# EAGLE board board_master (EAGLE 9.6.2)
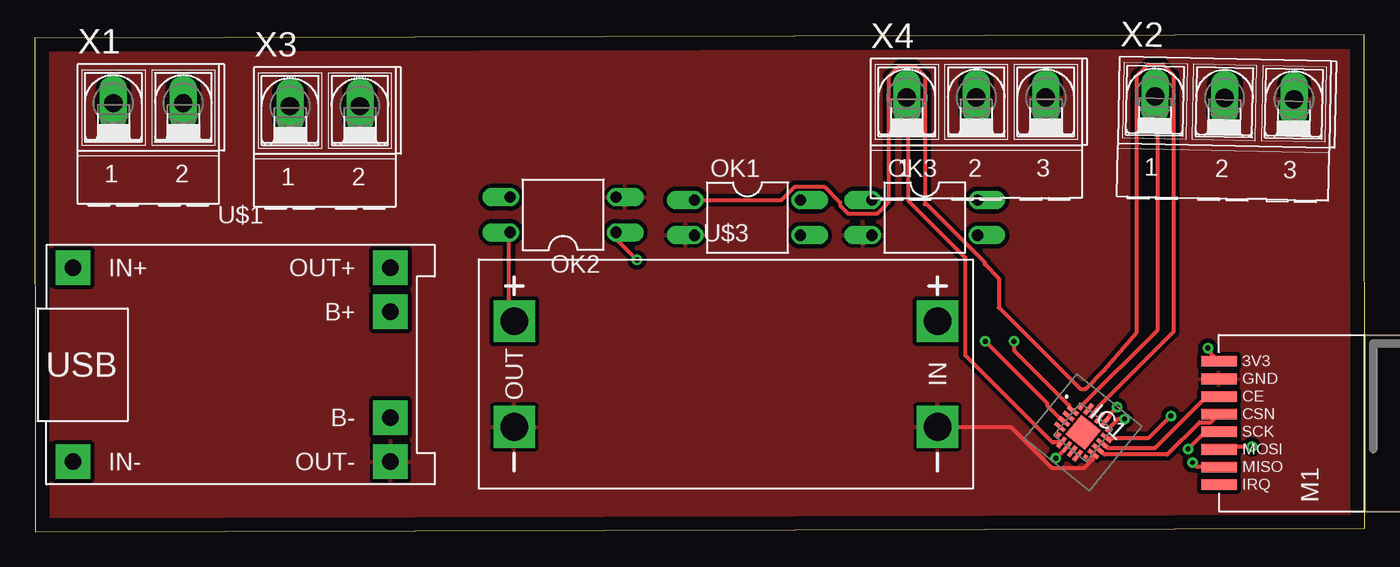
[diagram p0: board, top side]
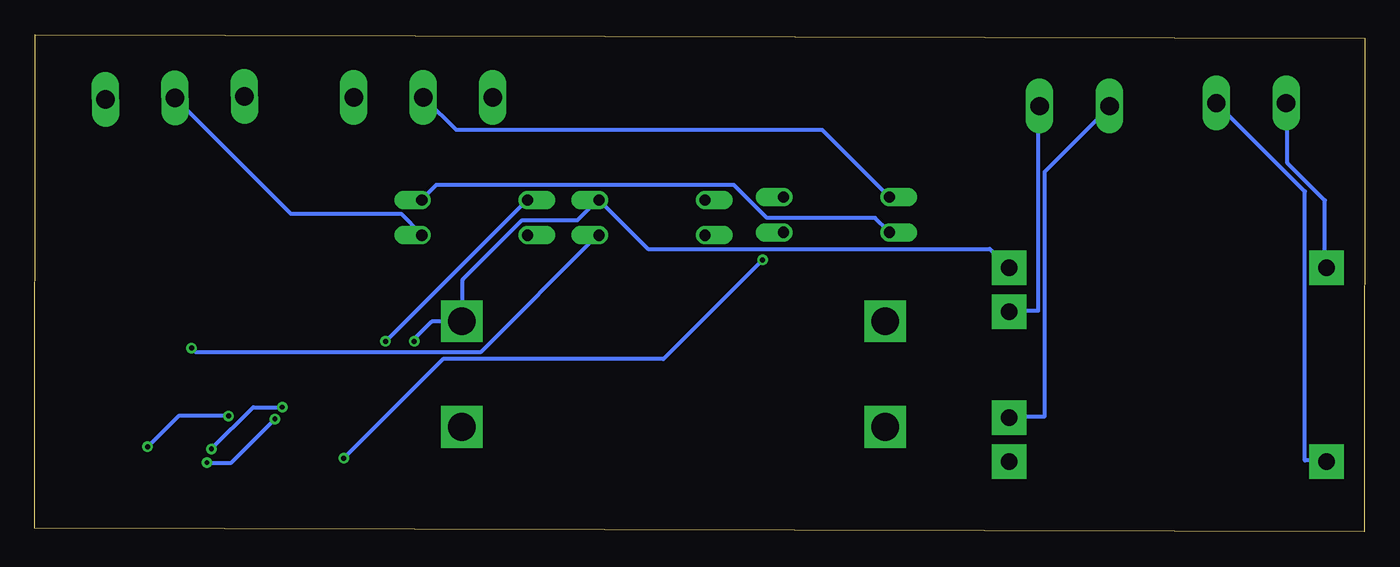
[diagram p1: board, bottom side, seen from below]

Size 95.77 x 35.82 mm. Coordinates in mm from the lower left corner, seen from the top.
Outline: 0.03,0 95.77,0.27 95.73,35.82 0,35.55 0.03,0
Copper layers (1*16): Top 0.035mm / dielectric 1.5mm / Bottom 0.035mm
Design rules "default": minimum track width 6mil, minimum drill 0.35mm, track to track 6mil, track to pad 6mil, pad to pad 6mil, via to via 6mil, smd to smd 6mil, copper to edge 40mil, drill to drill 6mil, minimum pad ring 10mil, minimum via ring 8mil, stop-mask expansion 4mil, vias tented up to drill 0mil, thermal gap 10mil
Net classes: 0 default: width 0.305 mm

## Footprints (pad centres in the part's own frame; a part is rotated, then mirrored left to right if it is on the bottom)
EFM8BB10F2GAQFN20R = smd 0.3 x 0.3: 1 -1.25,1.25; 6 -1.25,-1.25; 11 1.25,-1.25; 16 1.25,1.25 | smd 0.9 x 0.3: 2 -1.55,0.75; 3 -1.55,0.25; 4 -1.55,-0.25; 5 -1.55,-0.75; 12 1.55,-0.75; 13 1.55,-0.25; 14 1.55,0.25; 15 1.55,0.75 | smd 0.3 x 0.9: 7 -0.75,-1.55; 8 -0.25,-1.55; 9 0.25,-1.55; 10 0.75,-1.55; 17 0.75,1.55; 18 0.25,1.55; 19 -0.25,1.55; 20 -0.75,1.55 | smd 1.8 x 1.8: 21 0,0
WIRELESS-NRF24L01-SMD = smd 2.54 x 0.762: 1 1.27,0; 2 1.27,1.27; 3 1.27,2.54; 4 1.27,3.81; 5 1.27,5.08; 6 1.27,6.35; 7 1.27,7.62; 8 1.27,8.89
DIL04 = drill 0.813 offset: 1 -1.27,-3.81; 2 1.27,-3.81; 3 1.27,3.81; 4 -1.27,3.81
BATTERY-CHARGER-LI-PROT = drill 1.2 pad 2.5 square: B+ 10.795,3.81; B- 10.795,-3.81; IN+ -12.065,6.985; IN- -12.065,-6.985; OUT+ 10.795,6.985; OUT- 10.795,-6.985
DC-DC-STEP-UP-MT3608 = drill 2 pad 2.8 square: IN+ 15.24,3.81; IN- 15.24,-3.81; OUT+ -15.24,3.81; OUT- -15.24,-3.81
AK500/2-H = drill 1.321 long: 1 -2.515,0; 2 2.515,0
AK500/3-H = drill 1.321 long: 1 -5.004,0; 2 0,0; 3 5.004,0

## Placement (x,y rotation side)
IC1  EFM8BB10F2G-A-QFN20R  [EFM8BB10F2GAQFN20R]  75.49,7.17 320.9 top
M1  WIRELESS-NRF24L01SMD  [WIRELESS-NRF24L01-SMD]  84,3.41 0 top
OK1  PC817  [DIL04]  51.32,22.64 270 top
OK2  PC817  [DIL04]  38.04,22.85 90 top
OK3  PC817  [DIL04]  64.09,22.64 270 top
U$1  BATTERY-CHARGER-LI-PROT  [BATTERY-CHARGER-LI-PROT]  14.81,12.05 0 top
U$3  DC-DC-STEP-UP-MT3608  [DC-DC-STEP-UP-MT3608]  49.77,11.37 0 top
X1  [AK500/2-H]  8.18,30.89 0 top
X2  [AK500/3-H]  85.67,31.27 358.8 top
X3  [AK500/2-H]  20.9,30.67 0 top
X4  [AK500/3-H]  67.79,31.3 0 top

## Library data of the parts
IC1 = SamacSys_Parts; DESCRIPTION: 8-bit Microcontrollers - MCU 8051 25 MHz 2 kB fla sh 0.25 kB RAM 8-bi; HEIGHT: 0.8mm; MANUFACTURER_NAME: Silicon Labs; MANUFACTURER_PART_NUMBER: EFM8BB10F2G-A-QFN20R; MOUSER_PART_NUMBER: 634-8BB10F2GAQF20R; MOUSER_PRICE-STOCK: https://www.mouser.co.uk/ProductDetail/Silicon-Labs/EFM8BB10F2G-A-QFN20R?qs=DCjbIwhU0ZtADu%252B55HsWtA%3D%3D
M1 = nrf24l01plus
OK1-OK3 = optocoupler; MPN: PC817X4J000F; OC_FARNELL: 9707727; OC_NEWARK: 97K7059
U$1 U$3 = diy-modules_1
X1-X4 = con-ptr500; OC_FARNELL: unknown; OC_NEWARK: unknown

## Nets
GND: IC1.12 M1.7 OK1.2 OK2.2 OK3.2 U$1.OUT- U$3.IN- U$3.OUT- X2.3 X4.3
IN+: U$1.IN+ X1.1
IN-: U$1.IN- X1.2
N$1: IC1.2 OK3.1
N$2: IC1.1 X2.1
N$3: IC1.17 M1.4
N$4: IC1.16 M1.2
N$5: IC1.15 M1.3
N$6: IC1.14 M1.6
N$7: IC1.13 M1.5
N$8: IC1.19 OK1.1
N$9: OK3.3 X2.2
N$10: U$1.B- X3.1
N$11: U$1.B+ X3.2
N$12: OK2.4 OK3.4 U$3.OUT+
N$13: IC1.8 OK2.1
N$15: IC1.7 X4.1
N$16: OK2.3 X4.2
VCC: IC1.4 OK1.4 U$1.OUT+ U$3.IN+
VIN_NRF: M1.8 OK1.3

## Tracks (layer width: path | path; a pad name or v marks a point on that pad's centre or on a via)
GND
  Top 0.305: U$3.IN- 70.3,7.56 73.24,4.63 75.56,4.63 76.2,5.26 76.2,5.59 IC1.12
  pour Top (isolate 0.305): 0.39,35.03 95.43,35.03 95.43,0.87 0.39,0.87
IN+
  Bottom 0.305: X1.1 5.58,30.87 5.58,26.58 2.88,23.88 2.88,19.12 U$1.IN+
IN-
  Bottom 0.305: X1.2 10.66,30.87 4.31,24.52 4.31,5.15 2.88,5.15 U$1.IN-
N$1  (via drill 0.35)
  Top 0.305: v70.51,13.72 70.51,13.09 74.47,9.12 74.47,8.96 74.63,8.8 IC1.2
  Bottom 0.305: v70.51,13.72 60.35,23.88 OK3.1
N$2
  Top 0.305: IC1.1 75.27,8.96 80.82,14.52 80.82,31.35 X2.1
N$3  (via drill 0.35)
  Top 0.305: 85.27,7.37 M1.4 84.28,7.22 v83.05,5.98 | 77.17,8.01 IC1.17 77.05,7.97 77.38,8.3 77.38,8.41 v77.95,8.99
  Bottom 0.305: v83.05,5.98 80.04,8.99 v77.95,8.99
N$4  (via drill 0.35)
  Top 0.305: v78.47,8.13 78.02,8.13 IC1.16 | v83.36,4.99 83.68,4.68 M1.2
  Bottom 0.305: v78.47,8.13 81.61,4.99 v83.36,4.99
N$5  (via drill 0.35)
  Top 0.305: IC1.15 80.24,6.78 v81.81,8.35 | v87.64,6.13 85.45,6.13 M1.3
  Bottom 0.305: v81.81,8.35 85.42,8.35 v87.64,6.13
N$6
  Top 0.305: M1.6 85.12,9.91 84.52,9.91 80.67,6.06 77.25,6.06 76.92,6.39 IC1.14
N$7
  Top 0.305: M1.5 84.69,7.9 83.87,7.9 81.55,5.57 77.03,5.57 76.92,5.69 76.85,5.69 IC1.13
N$8
  Top 0.305: IC1.19 76.24,8.57 76.6,9.01 82,14.41 82,32.9 81.23,33.67 80.15,33.67 79.34,32.86 79.34,14.38 77.03,11.66 75.68,10.31 75.27,10.31 69.41,16.16 69.41,18.27 68.4,19.28 68.4,19.41 64.2,23.61 64.08,23.61 64.08,32.82 63.33,33.58 62.25,33.58 61.49,32.82 61.49,23.76 60.68,22.95 58.56,22.95 57.99,23.51 57.99,23.73 56.85,24.88 54.73,24.88 53.76,23.91 OK1.1
N$9
  Bottom 0.305: OK3.3 67.97,21.5 69.39,22.93 77.33,22.93 85.59,31.19 X2.2
N$10
  Bottom 0.305: X3.1 18.44,30.55 23.04,25.95 23.04,8.33 25.58,8.33 U$1.B-
N$11
  Bottom 0.305: X3.2 23.52,30.55 23.52,15.95 25.58,15.95 U$1.B+
N$12
  Top 0.305: OK2.4 34.15,21.5 34.15,15.63 34.47,15.31 U$3.OUT+
  Bottom 0.305: OK3.4 67.81,24.04 66.85,25 45.42,25 43.04,22.61 35.26,22.61 34.31,21.66 OK2.4
N$13  (via drill 0.35)
  Top 0.305: v73.52,5.31 74.32,6.1 IC1.8 | v43.36,19.6 41.93,21.03 41.93,21.5 OK2.1
  Bottom 0.305: v73.52,5.31 66.38,12.45 50.5,12.45 v43.36,19.6
N$15
  Top 0.305: IC1.7 73.28,6.44 66.98,12.74 66.98,19.79 62.89,23.88 62.89,31.19 X4.1
N$16
  Bottom 0.305: OK2.3 34.31,24.2 39.07,28.96 65.43,28.96 67.65,31.19 X4.2
VCC  (via drill 0.35)
  Top 0.305: v68.44,13.72 72.89,9.28 72.89,9.12 74,8.01 IC1.4
  Bottom 0.305: v68.44,13.72 68.44,13.9 67.19,15.15 65.11,15.15 U$3.IN+ 64.95,15.31 64.95,18.17 60.66,22.46 56.69,22.46 55.27,23.88 OK1.4 55.11,23.88 51.61,20.39 27.01,20.39 25.74,19.12 U$1.OUT+
VIN_NRF  (via drill 0.35)
  Top 0.305: M1.8 84.48,13.09 v84.48,13.25
  Bottom 0.305: v84.48,13.25 84.16,12.93 63.68,12.93 55.27,21.34 OK1.3